# EAGLE board FreqDiv12080 (EAGLE 6.1)
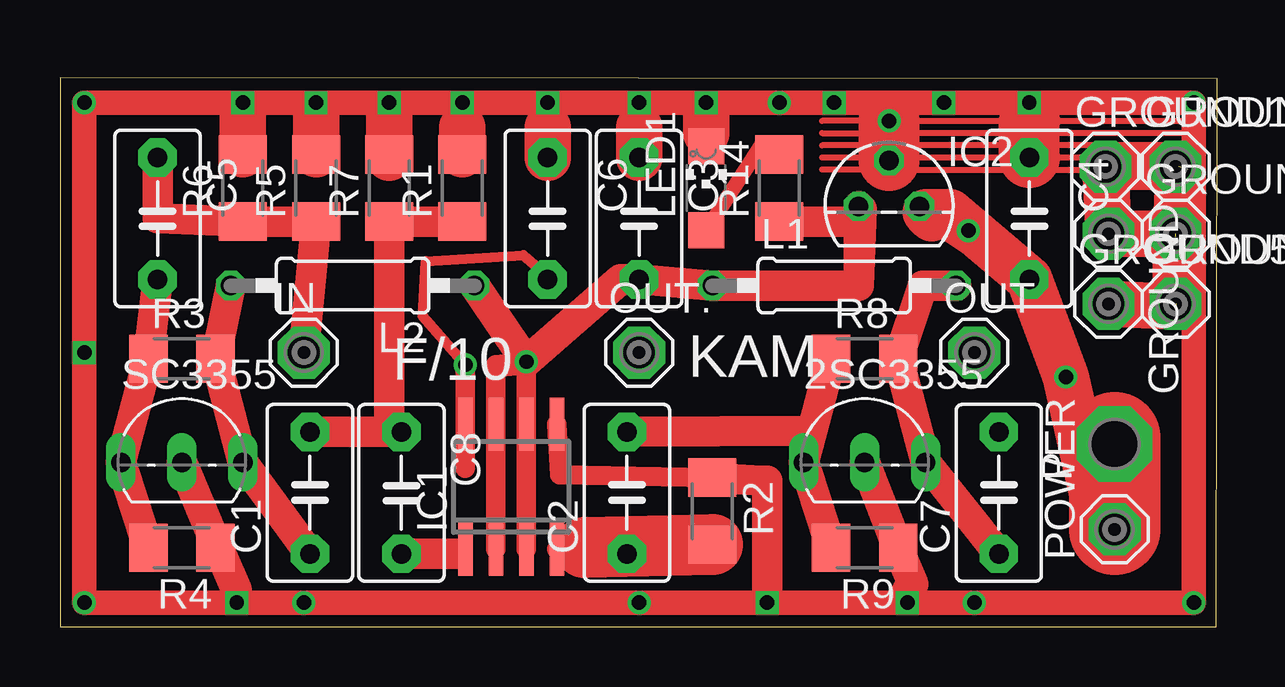
[diagram p0: board, top side]
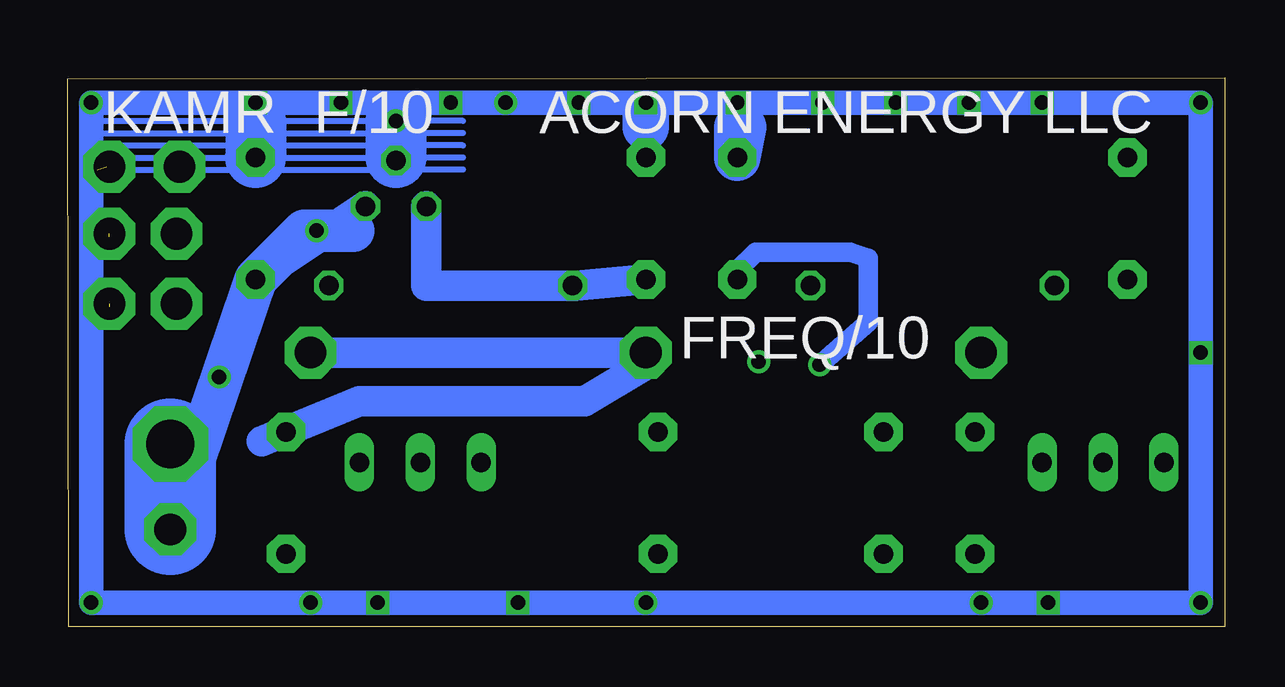
[diagram p1: board, bottom side, seen from below]

Size 48.21 x 22.88 mm. Coordinates in mm from the lower left corner, seen from the top.
Outline: 0,0 48.18,0 48.21,22.85 0,22.88 0,0
Copper layers (1*16): Top 0.0356mm / dielectric 1.5011mm / Bottom 0.0356mm
Design rules: minimum track width 6mil, minimum drill 13mil, track to track 6mil, track to pad 6mil, pad to pad 6mil, via to via 6mil, smd to smd 6mil, copper to edge 15mil, drill to drill 6mil, minimum pad ring 7mil, minimum via ring 7mil, stop-mask expansion 2.5mil, vias tented up to drill 0mil, thermal gap 10mil

## Footprints (pad centres in the part's own frame; a part is rotated, then mirrored left to right if it is on the bottom)
TO92-BEC = drill 0.813 long: B -2.54,0; C 2.54,0; E 0,0
C5B3.5 = drill 0.813 pad 1.6 octagon: 1 -2.54,0; 2 2.54,0
SE13 = drill 1.321 pad 2.159 octagon: MP 0,0
SO08 = smd 0.6 x 2.2: 1 -1.905,-2.6; 2 -0.635,-2.6; 3 0.635,-2.6; 4 1.905,-2.6; 5 1.905,2.6; 6 0.635,2.6; 7 -0.635,2.6; 8 -1.905,2.6
TO92 = drill 0.813 octagon: 1 -1.27,0; 2 0,1.905; 3 1.27,0
0207/10 = drill 0.813 octagon: 1 -5.08,0; 2 5.08,0
CHIPLED_1206 = smd 1.5 x 1.5: A 0,-1.75; C 0,1.75
P1-20 = drill 2.007 pad 3.15 octagon: TP 0,0
M1206 = smd 1.6 x 2: 1 -1.4,0; 2 1.4,0

## Placement (x,y rotation side)
2SC3355  [TO92-BEC]  33.53,6.86 0 top
C1  1nF  [C5B3.5]  10.41,5.59 90 top
C2  1nF  [C5B3.5]  23.62,5.59 90 top
C3  1uF  [C5B3.5]  24.13,17.02 270 top
C4  1uF  [C5B3.5]  40.39,17.02 270 top
C5  1nF  [C5B3.5]  4.06,17.02 270 top
C6  1nF  [C5B3.5]  20.32,17.02 270 top
C7  1nF  [C5B3.5]  39.12,5.59 90 top
C8  1nF  [C5B3.5]  14.22,5.59 270 top
GROUND  SE13  [SE13]  43.69,16.38 270 top
GROUND1  SE13  [SE13]  43.56,19.18 0 top
GROUND2  SE13  [SE13]  46.48,19.18 0 top
GROUND3  SE13  [SE13]  46.48,16.38 0 top
GROUND4  SE13  [SE13]  46.48,13.46 0 top
GROUND5  SE13  [SE13]  43.69,13.46 0 top
IC1  MC12080D  [SO08]  18.8,5.84 0 top
IC2  78L05Z  [TO92]  34.54,17.53 0 top
IN  SE13  [SE13]  10.16,11.43 0 top
L1  1mH  [0207/10]  32.26,14.22 0 top
L2  1mH  [0207/10]  12.19,14.22 180 top
LED1  [CHIPLED_1206]  26.92,18.29 0 top
OUT  SE13  [SE13]  38.1,11.43 0 top
OUT.  SE13  [SE13]  24.13,11.43 0 top
P  TPPAD1-20  [P1-20]  43.94,7.62 90 top
POWER  SE13  [SE13]  43.94,4.06 90 top
R1  100  [M1206]  16.76,18.29 90 top
R2  820  [M1206]  27.18,4.83 270 top
R3  10k  [M1206]  5.08,11.18 0 top
R4  3k3  [M1206]  5.08,3.3 180 top
R5  100  [M1206]  10.67,18.29 90 top
R6  100  [M1206]  7.62,18.29 90 top
R7  100  [M1206]  13.72,18.29 90 top
R8  10k  [M1206]  33.53,11.18 0 top
R9  3k3  [M1206]  33.53,3.3 180 top
R14  1k  [M1206]  29.97,18.29 90 top
SC3355  [TO92-BEC]  5.08,6.86 0 top

## Library data of the parts
2SC3355 SC3355 = transistor
C1-C8 = capacitor-wima
GROUND GROUND1-GROUND5 IN OUT OUT. POWER = solpad
IC1 = on-semiconductor; MF: ON SEMICONDUCTOR; MPN: MC12080D; OC_FARNELL: 1607924; OC_NEWARK: 40C2542
IC2 = linear
L1 L2 = eagle-ltspice; SPICEMODEL: NONE; SPICEPREFIX: L
LED1 R1-R9 R14 = adafruit
P = testpad

## Nets
N$1: C4.2 IC2.3 P.TP POWER.MP
N$2: C2.1 IC1.4 R2.2
N$3: 2SC3355.B C2.2 R8.1 R9.2
N$4: C3.2 IC1.2 IC1.3 IC1.6 IC1.7 IC2.1 L1.1 L2.1 R14.1
N$5: C5.1 IN.MP R5.1 R6.1
N$6: C5.2 R3.1 R4.2 SC3355.B
N$7: C7.2 OUT..MP OUT.MP
N$8: 2SC3355.C C7.1 L1.2 R8.2
N$10: LED1.A R14.2
N$11: C6.2 IC1.8
N$12: C1.2 C8.1 R1.1 R7.1
N$14: 2SC3355.E C3.1 C4.1 C6.1 GROUND1.MP GROUND2.MP GROUND3.MP GROUND4.MP GROUND5.MP GROUND.MP IC1.5 IC2.2 LED1.C R1.2 R2.1 R4.1 R5.2 R6.2 R7.2 R9.1 SC3355.E
N$16: C8.2 IC1.1
N$17: C1.1 L2.2 R3.2 SC3355.C

## Tracks (layer width: path | path; a pad name or v marks a point on that pad's centre or on a via)
N$1  (via drill 0.6)
  Top 0.508: P.TP 44.2,7.61
  Top 0.61: 44.2,8.89 P.TP
  Top 1.27: POWER.MP 44.2,7.62 44.2,7.61 | C4.2 IC2.3
  Top 1.93: 44.2,7.62 43.18,4.83 v41.91,10.41 C4.2 37.08,17.27 36.07,17.27 36.32,17.02
  Top 3.81: POWER.MP P.TP 43.94,7.87
  Bottom 1.27: IC2.3 C4.2
  Bottom 1.778: 44.45,8.38 P.TP 43.43,5.59 C4.2 38.35,16.51 v37.85,16.51 36.32,16.51
  Bottom 3.81: P.TP POWER.MP
N$2
  Top 0.813: IC1.4 21.84,3.3 C2.1
  Top 2.54: R2.2 21.84,3.3
N$3
  Top 1.27: R9.2 2SC3355.B 31.34,8.17 | 31.34,8.17 R8.1 | C2.2 31.34,8.17
N$4  (via drill 0.6)
  Top 0.152: 29.97,17.02 R14.1
  Top 0.813: IC1.6 19.43,7.87 | 19.43,7.87 IC1.3 | IC1.7 IC1.2 18.16,10.79 | IC1.7 18.16,10.79 | 18.16,10.79 18.16,10.92 | 18.16,10.92 v19.43,11.05 | IC1.7 18.16,10.79 | 18.16,10.79 18.16,10.92 | 18.16,10.92 19.43,10.92 | 18.16,10.79 19.43,10.92 | 19.43,10.92 19.43,7.87
  Top 1.27: L1.1 C3.2 23.37,14.48 v19.43,11.05 L2.1 | IC2.1 33.27,16.89 | 33.27,16.89 33.27,14.35 33.27,14.22 | 33.27,14.22 L1.1 | L1.1 33.27,14.22 | 33.27,14.22 33.4,17.4 33.27,16.89 | 33.27,16.89 R14.1
  Bottom 1.27: C3.2 27.05,14.22 | L1.1 33.27,14.22 IC2.1
N$5
  Top 1.27: C5.1 4.06,17.02 R6.1 R5.1 IN.MP
N$6
  Top 1.27: R4.2 SC3355.B R3.1 C5.2
N$7
  Bottom 1.27: OUT.MP OUT..MP 24.13,10.92 26.67,9.4 36.07,9.4 40.13,7.75 39.24,8.13 C7.2
N$8
  Top 1.27: C7.1 2SC3355.C R8.2 35.94,14.22 L1.2
N$10
  Top 0.61: LED1.A 29.21,20.07 R14.2
N$11  (via drill 0.6)
  Top 0.406: v16.89,10.92 15.11,12.95 15.24,15.24 19.3,15.49 20.32,14.61
  Top 0.813: IC1.8 16.89,6.6 v16.89,10.92
  Bottom 0.813: C6.2 20.32,14.86 19.56,15.62 15.62,15.62 14.86,15.37 14.86,12.7 v16.89,10.92
N$12
  Top 1.27: C1.2 13.72,8.13 | 13.72,8.13 C8.1 | R1.1 R7.1 13.72,8.13
N$14  (via drill 0.6)  (3 unrouted)
  Top 0.152: 26.92,21.34 v26.92,21.84 | v16.76,21.84 16.76,20.83 | 7.62,21.34 v7.62,21.84 | 10.67,21.34 v10.67,21.84 | 13.72,21.34 v13.72,21.84 | 35.31,1.52 v35.31,1.02 | 29.46,1.27 29.72,1.27 v29.46,1.02 | 31.5,21.59 31.5,21.84
  Top 0.254: 33.53,21.08 31.75,21.08 | 33.53,21.08 33.53,20.57 | 31.75,20.57 33.53,20.57 | 33.53,20.57 33.53,20.07 | 33.53,20.07 31.75,20.07 | 33.53,20.07 35.56,20.07 | 46.86,20.07 46.23,20.07 35.56,20.07 | 35.56,20.07 35.56,20.57 | 47.12,20.57 35.56,20.57 | 35.56,20.57 35.56,21.08 | 35.56,21.08 46.99,21.08 | 35.56,21.08 v34.54,21.08 33.53,21.08 | 33.53,20.07 33.53,19.56 | 33.53,19.56 31.75,19.56 | 33.53,19.56 34.54,19.56 | 46.99,19.56 34.54,19.56 | 34.54,19.56 34.54,19.05 | 34.54,19.05 31.75,19.05 | 34.54,19.05 47.12,19.05 | 36.58,21.59 36.83,21.59 arc90 36.58,21.84 34.54,21.84 | 32.26,21.59 v32.26,21.84
  Top 0.61: 24.13,20.32 24.13,21.59 | 27.18,21.84 26.92,21.59 26.92,20.57 | 25.91,21.84 v24.13,21.84 24.13,21.59 | 20.32,20.83 v20.32,21.84 | 24.13,21.59 24.38,21.84 v26.92,21.84 | v26.92,21.84 v29.97,21.84 | 40.39,20.32 40.39,21.08 v40.39,21.84 34.54,21.84 v26.92,21.84 | LED1.C v26.92,21.84
  Top 0.813: IC1.5 20.83,6.35 R2.1 | 7.37,1.52 v7.37,1.02
  Top 1.016: 34.54,21.84 v36.83,21.84 v40.39,21.84 44.2,21.84 v47.24,21.84 47.24,19.56 47.24,17.53 47.24,14.73 47.24,11.3 v47.24,1.02 v38.1,1.02 v35.31,1.02 v29.46,1.02 v24.13,1.02 v10.16,1.02 v7.37,1.02 v1.02,1.02 v1.02,11.43 v1.02,21.84 v7.62,21.84 v10.67,21.84 v13.72,21.84 v16.76,21.84 v20.32,21.84 v24.13,21.84 v26.92,21.84 27.18,21.84 v29.97,21.84 31.5,21.84 v32.26,21.84 34.54,21.84 | 34.54,19.3 34.54,19.56 v34.54,21.08 34.54,21.84
  Top 1.27: R9.1 2SC3355.E 34.8,3.56 35.56,1.78 35.31,1.52 | R2.1 29.21,6.1 29.46,6.1 29.46,1.27 | SC3355.E 6.35,3.81 7.37,1.52 6.6,3.3 R4.1
  Top 1.93: R6.2 7.62,21.34 | 10.67,21.34 R5.2 | 13.72,21.34 R7.2 13.72,19.56 | C6.1 20.32,20.83 | R1.2 16.76,20.83 | C3.1 24.13,20.32 24.13,20.83 | 26.92,20.57 26.92,21.34 | 40.39,20.83 40.39,20.32 C4.1 | GROUND2.MP GROUND1.MP GROUND.MP GROUND3.MP | GROUND5.MP 46.48,13.34 46.48,16.26 46.61,19.18
  Top 2.54: IC2.2 34.54,19.56 v34.54,21.08 | C4.1 40.39,21.08
  Bottom 0.254: 46.99,19.05 34.54,19.05 | 31.75,19.05 34.54,19.05 | 34.54,19.05 34.54,19.56 | 31.75,19.56 34.54,19.56 | 46.86,19.56 34.54,19.56 | 31.75,20.07 34.54,20.07 46.99,20.07 | 31.75,20.57 34.54,20.57 46.99,20.57 | 31.75,21.08 v34.54,21.08 | 46.99,21.08 v34.54,21.08 | v34.54,21.08 34.54,21.59
  Bottom 0.813: v40.39,21.84 40.39,21.08 40.39,20.83 | v24.13,21.84 24.13,20.83
  Bottom 1.016: 34.54,19.56 34.54,19.3 | 44.2,21.84 v40.39,21.84 v36.83,21.84 v32.26,21.84 v29.97,21.84 v26.92,21.84 v24.13,21.84 v20.32,21.84 v16.76,21.84 v13.72,21.84 v10.67,21.84 v7.62,21.84 v1.02,21.84 v1.02,11.43 v1.02,1.02 v7.37,1.02 v10.16,1.02 v24.13,1.02 v29.46,1.02 v35.31,1.02 v38.1,1.02 v47.24,1.02 47.24,11.3 47.24,14.73 47.24,17.53 47.24,19.56 v47.24,21.84 44.2,21.84
  Bottom 1.93: 40.39,20.83 40.39,19.81 | 20.07,20.83 C6.1 20.32,20.83 | 24.13,20.83 24.13,21.34
  Bottom 2.54: v34.54,21.08 34.54,20.57 34.54,20.07 34.54,19.56 | 40.39,21.08 C4.1
N$16
  Top 0.61: IC1.1 C8.2
  Top 1.27: 16.51,3.05 C8.2
N$17
  Top 1.27: L2.2 R3.2 SC3355.C C1.1

## Text on the board
tPlace: F/10 | KAM
bPlace: ACORN ENERGY LLC | F/10 | KAMR | FREQ/10
tOrigins: GND | F/10 | +VCC